# EAGLE board reflip_1.3 (EAGLE 8.7.0)
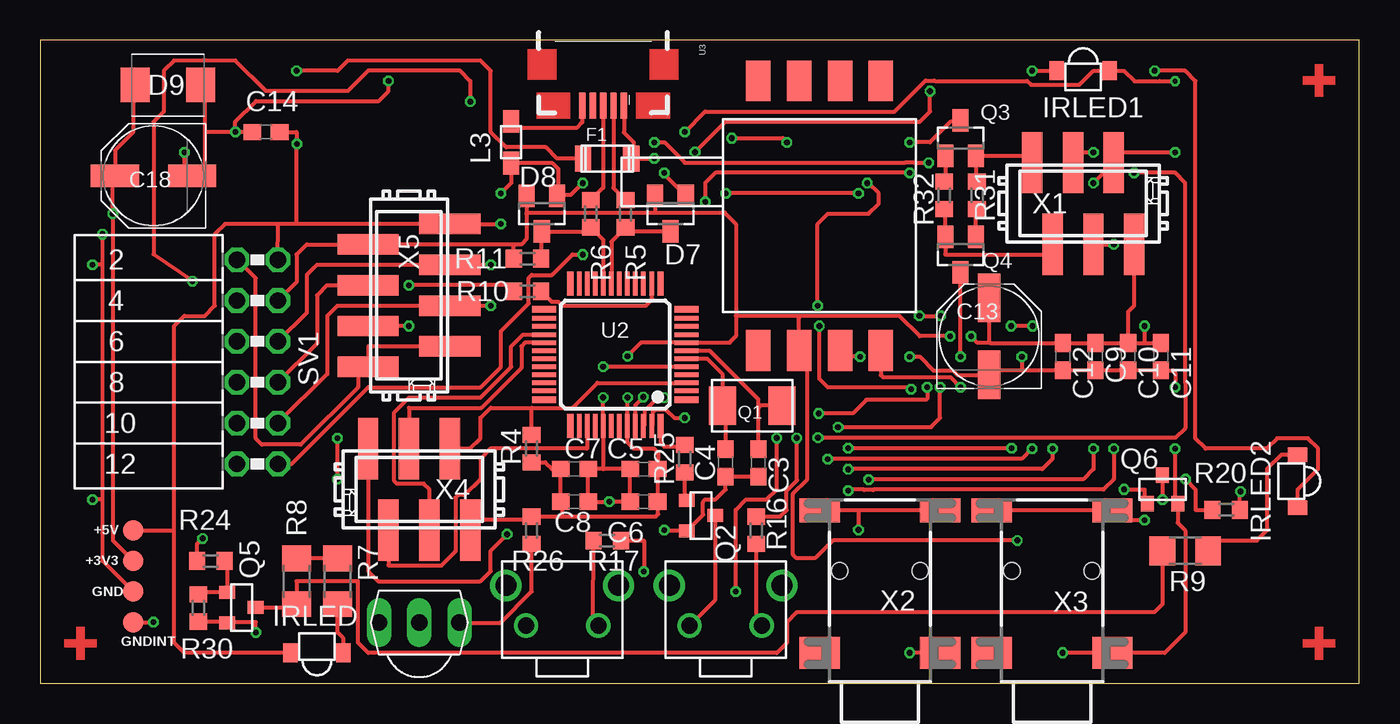
[diagram p0: board, top side]
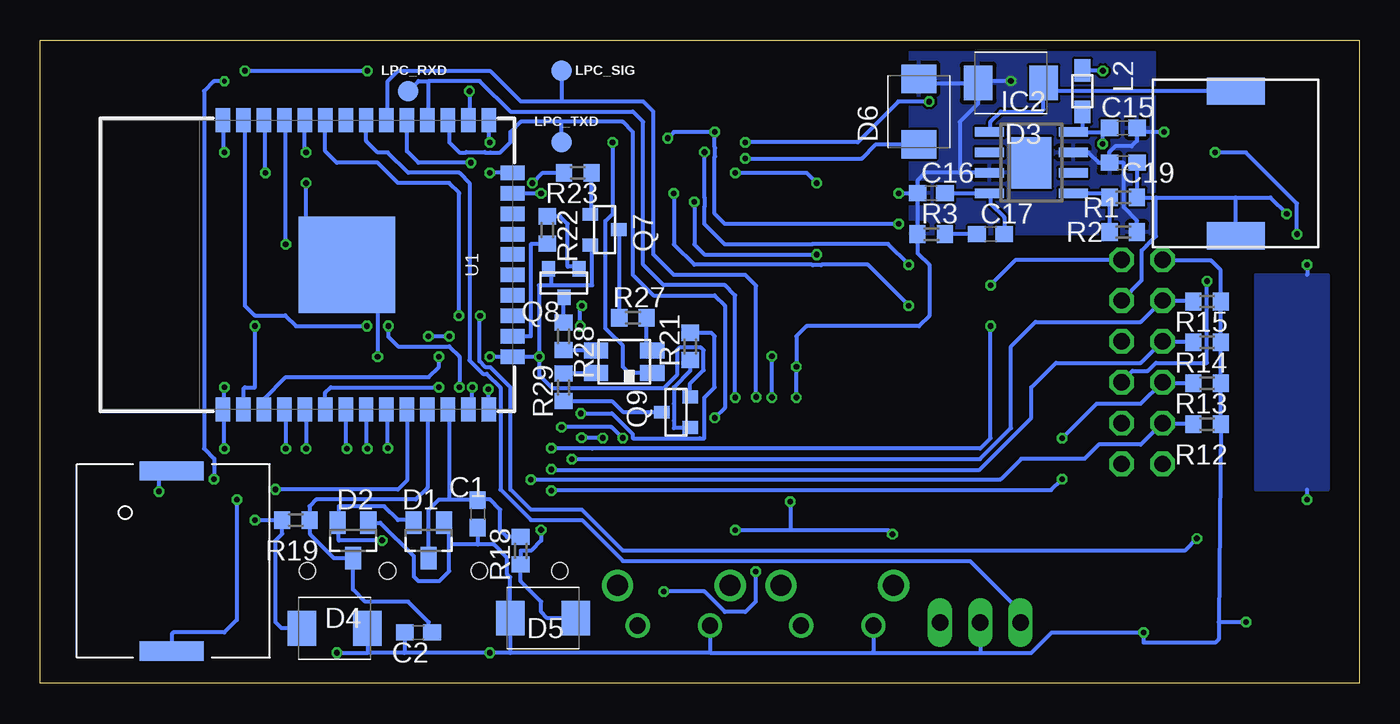
[diagram p1: board, bottom side, seen from below]

Size 82 x 40 mm. Coordinates in mm from the lower left corner, seen from the top.
Outline: 0,0 82,0 82,40 0,40 0,0
Copper layers (1*16): Top 0.035mm / dielectric 1.5mm / Bottom 0.035mm
Design rules "NOA Eagle Rule 2016-06-12": minimum track width 6mil, minimum drill 0.3mm, track to track 6mil, track to pad 6mil, pad to pad 6mil, via to via 6mil, smd to smd 0mil, copper to edge 0.4mm, drill to drill 10mil, minimum pad ring 10mil, minimum via ring 6mil, stop-mask expansion 2mil, vias tented up to drill 25mil, thermal gap 10mil

## Footprints (pad centres in the part's own frame; a part is rotated, then mirrored left to right if it is on the bottom)
C0603 = smd 1.1 x 1: 1 -0.85,0; 2 0.85,0
PANASONIC_D = smd 3 x 1.4: + 2.4,0; - -2.4,0
SOT23 = smd 1 x 1.4: 1 -0.95,-1.1; 2 0.95,-1.1; 3 0,1.1
SMBJ = smd 1.78 x 2.16: A 2.04,0; C -2.03,0
FUSE = smd 1 x 1.6: P$1 -1.5,0; P$2 1.5,0
HSOP8 = smd 0.6 x 1.8: 1 -1.905,-2.6; 2 -0.635,-2.6; 3 0.635,-2.6; 4 1.905,-2.6; 5 1.905,2.6; 6 0.635,2.6; 7 -0.635,2.6; 8 -1.905,2.6 | smd 3.2 x 2.51: EXP 0,0
IRLED = smd 0.9 x 1.2: A 1.65,0; C -1.65,0
SPULE = smd 3.6 x 1.7: P$1 0,4.5; P$2 0,-4.5
FERRITEBEAD = smd 1.4 x 1: P$1 -1.3,0; P$2 1.3,0
MPX_PRESSURE_SENSOR = smd 2.54 x 1.52: P$1 -8.38,3.81; P$2 -8.38,1.27; P$3 -8.38,-1.27; P$4 -8.38,-3.81; P$5 8.38,-3.81; P$6 8.38,-1.27; P$7 8.38,1.27; P$8 8.38,3.81
CRYSTAL = smd 1.7 x 2.4: P$1 -1.85,0; P$2 1.85,0
SOT-23 = smd 0.802 x 0.972: 1 0.95,0.885; 2 -0.95,0.885; 3 0,-0.885
R0603 = smd 1 x 1.1: 1 -0.85,0; 2 0.85,0
R1206 = smd 1.6 x 1.803: 1 -1.422,0; 2 1.422,0
RGBLED = smd 1.5 x 1: B -1.75,-0.7; CA 1.75,-0.7; G -1.75,0.7; R 1.75,0.7
FE06-2W = drill 1.016 octagon: 1 -6.35,1.27; 2 -6.35,-1.27; 3 -3.81,1.27; 4 -3.81,-1.27; 5 -1.27,1.27; 6 -1.27,-1.27; 7 1.27,1.27; 8 1.27,-1.27; 9 3.81,1.27; 10 3.81,-1.27; 11 6.35,1.27; 12 6.35,-1.27
SWITCHES = drill 1.3: P$1 -3.5,0; P$2 3.5,0 | drill 1: P$3 -2.25,-2.5; P$4 2.25,-2.5
ESP-WROOM-03 = smd 0.9 x 1.5: 1 7.7,9; 2 6.43,9; 3 5.16,9; 4 3.89,9; 5 2.62,9; 6 1.35,9; 7 0.08,9; 8 -1.19,9; 9 -2.46,9; 10 -3.73,9; 11 -5,9; 12 -6.27,9; 13 -7.54,9; 14 -8.81,9; 25 -8.81,-9; 26 -7.54,-9; 27 -6.27,-9; 28 -5,-9; 29 -3.73,-9; 30 -2.46,-9; 31 -1.19,-9; 32 0.08,-9; 33 1.35,-9; 34 2.62,-9; 35 3.89,-9; 36 5.16,-9; 37 6.43,-9; 38 7.7,-9 | smd 1.5 x 0.9: 15 -10.3,5.715; 16 -10.3,4.445; 17 -10.3,3.175; 18 -10.3,1.905; 19 -10.3,0.635; 20 -10.3,-0.635; 21 -10.3,-1.905; 22 -10.3,-3.175; 23 -10.3,-4.445; 24 -10.3,-5.715 | smd 6 x 6: GND 0,0
SOT313-2 = smd 0.4 x 1.5: 1 -2.81,-4.425; 12 2.81,-4.425; 25 2.81,4.425; 36 -2.81,4.425 | smd 0.28 x 1.5: 2 -2.25,-4.425; 3 -1.75,-4.425; 4 -1.25,-4.425; 5 -0.75,-4.425; 6 -0.25,-4.425; 7 0.25,-4.425; 8 0.75,-4.425; 9 1.25,-4.425; 10 1.75,-4.425; 11 2.25,-4.425; 26 2.25,4.425; 27 1.75,4.425; 28 1.25,4.425; 29 0.75,4.425; 30 0.25,4.425; 31 -0.25,4.425; 32 -0.75,4.425; 33 -1.25,4.425; 34 -1.75,4.425; 35 -2.25,4.425 | smd 1.5 x 0.4: 13 4.425,-2.81; 24 4.425,2.81; 37 -4.425,2.81; 48 -4.425,-2.81 | smd 1.5 x 0.28: 14 4.425,-2.25; 15 4.425,-1.75; 16 4.425,-1.25; 17 4.425,-0.75; 18 4.425,-0.25; 19 4.425,0.25; 20 4.425,0.75; 21 4.425,1.25; 22 4.425,1.75; 23 4.425,2.25; 38 -4.425,2.25; 39 -4.425,1.75; 40 -4.425,1.25; 41 -4.425,0.75; 42 -4.425,0.25; 43 -4.425,-0.25; 44 -4.425,-0.75; 45 -4.425,-1.25; 46 -4.425,-1.75; 47 -4.425,-2.25
USB-MICRO-SMD = smd 1.6 x 0.4: D+1 2.55,0; D-1 2.55,0.65; GND1 2.55,-1.3; ID1 2.55,-0.65; VBUS1 2.55,1.3
BUZZ_PIEZO_SMD = smd 1.2 x 4: 1 -5.6,0.1; 2 5.6,0.1
TSOP18XX = drill 1.016 pad 1.321 long: GND -0.001,-0.027; OUT -2.501,-0.027; VCC 2.499,-0.027
TESTPUNKT = smd 1.27 x 1.27: P$1 0,0
MICROMATCH-6SMD = smd 1.27 x 3.81: 1 3.175,-2.54; 2 1.905,2.54; 3 0.635,-2.54; 4 -0.635,2.54; 5 -1.905,-2.54; 6 -3.175,2.54
1503_02 = smd 2.5 x 1.5: 1 -3.75,-10.75; 3 3.75,-10.75 | smd 2.5 x 2: 2 -3.75,-1.9; 2@2 3.75,-1.9 | hole 1: -2.5,-7; 2.5,-7
MICROMATCH-8-SMD = smd 1.27 x 3.81: 1 4.445,-2.54; 2 3.175,2.54; 3 1.905,-2.54; 4 0.635,2.54; 5 -0.635,-2.54; 6 -1.905,2.54; 7 -3.175,-2.54; 8 -4.445,2.54

## Placement (x,y rotation side)
C1  22n  [C0603]  54.8,10.54 270 bottom
C2  22n  [C0603]  58.48,3.17 180 bottom
C3  18p  [C0603]  44.64,13.72 90 top
C4  18p  [C0603]  42.61,13.72 90 top
C5  100n  [C0603]  37.53,13.34 180 top
C6  10n  [C0603]  37.53,11.3 180 top
C7  100n  [C0603]  33.21,13.34 0 top
C8  10n  [C0603]  33.21,11.3 0 top
C9  1u  [C0603]  65.6,20.32 270 top
C10  10n  [C0603]  67.63,20.32 270 top
C11  100n  [C0603]  69.66,20.32 270 top
C12  10u  [C0603]  63.56,20.32 270 top
C13  100u  [PANASONIC_D]  58.99,21.59 90 top
C14  10n  [C0603]  14.04,34.29 0 top
C15  10u  [C0603]  14.67,34.54 180 bottom
C16  220p  [C0603]  26.61,30.48 0 bottom
C17  22n  [C0603]  22.93,27.94 0 bottom
C18  100u  [PANASONIC_D]  7.05,31.57 180 top
C19  10u  [C0603]  14.67,32.38 180 bottom
D1  BAT54S  [SOT23]  57.85,8.89 180 bottom
D2  BAT54S  [SOT23]  62.55,8.89 180 bottom
D3  RECT  [SMBJ]  21.66,37.34 180 bottom
D4  [SMBJ]  63.69,3.43 0 bottom
D5  [SMBJ]  50.74,4.06 180 bottom
D6  [SMBJ]  27.37,35.56 90 bottom
D7  BAT54S  [SOT23]  39.18,29.21 180 top
D8  BAT54S  [SOT23]  31.18,29.21 180 top
D9  [SMBJ]  7.94,37.21 0 top
F1  0.75A  [FUSE]  35.24,32.64 180 top
IC2  L5970D  [HSOP8]  20.39,32.38 270 bottom
IRLED  [IRLED]  17.21,1.91 180 top
IRLED1  [IRLED]  64.83,38.1 0 top
IRLED2  [IRLED]  78.17,12.57 270 top
L1  33u  [SPULE]  7.68,32.33 0 bottom
L2  FERRITE-BEAD  [FERRITEBEAD]  17.21,36.83 270 bottom
L3  FERRITE-BEAD  [FERRITEBEAD]  29.27,33.66 270 top
MPX  [MPX_PRESSURE_SENSOR]  48.45,29.08 90 top
Q1  CRYSTAL  [CRYSTAL]  44.26,17.27 180 top
Q2  POWERFET  [SOT-23]  41.09,10.44 90 top
Q3  BC847B  [SOT23]  57.22,33.91 0 top
Q4  BC847B  [SOT23]  57.22,26.67 180 top
Q5  POWERFET  [SOT-23]  12.51,4.72 90 top
Q6  POWERFET  [SOT-23]  69.76,12.06 180 top
Q7  POWERFET  [SOT-23]  46.93,28.22 90 bottom
Q8  POWERFET  [SOT-23]  49.44,24.89 0 bottom
Q9  POWERFET  [SOT-23]  42.48,16.87 270 bottom
R1  5k6  [R0603]  14.67,30.23 0 bottom
R2  3k3  [R0603]  14.67,28.07 180 bottom
R3  4k7  [R0603]  26.61,27.94 0 bottom
R4  10k  [R0603]  30.55,14.61 270 top
R5  33  [R0603]  36.39,29.21 270 top
R6  33  [R0603]  34.23,29.21 270 top
R7  22  [R1206]  18.48,6.35 90 top
R8  22  [R1206]  15.94,6.35 270 top
R9  22  [R1206]  71.19,8.26 180 top
R10  100  [R0603]  30.29,24.38 0 top
R11  1k5  [R0603]  30.29,26.42 180 top
R12  10k  [R0603]  9.46,16.13 180 bottom
R13  10k  [R0603]  9.46,18.67 180 bottom
R14  10k  [R0603]  9.46,21.21 180 bottom
R15  10k  [R0603]  9.46,23.75 180 bottom
R16  1k5  [R0603]  44.52,9.53 90 top
R17  1k5  [R0603]  35.24,8.89 0 top
R18  1k5  [R0603]  52.13,8.26 90 bottom
R19  1k5  [R0603]  66.11,10.16 0 bottom
R20  1k5  [R0603]  73.72,10.79 180 top
R21  100  [R0603]  41.59,20.95 90 bottom
R22  100  [R0603]  50.48,28.19 270 bottom
R23  100  [R0603]  48.58,31.75 180 bottom
R24  100  [R0603]  10.61,7.62 180 top
R25  100  [R0603]  40.07,13.97 90 top
R26  100  [R0603]  30.55,9.53 270 top
R27  150  [R0603]  45.15,22.73 0 bottom
R28  68  [R0603]  49.47,21.59 270 bottom
R29  68  [R0603]  49.47,18.41 90 bottom
R30  10k  [R0603]  9.84,4.7 270 top
R31  10k  [R0603]  58.23,30.35 270 top
R32  10k  [R0603]  56.2,30.35 90 top
RGB  RGBLED  [RGBLED]  45.7,20 0 bottom
SV1  CON-MAIN  [FE06-2W]  13.5,20 270 top
T1  SWITCH  [SWITCHES]  42.61,6.1 0 top
T2  SWITCH  [SWITCHES]  32.45,6.1 0 top
U1  ESP-WROOM-03  [ESP-WROOM-03]  62.93,26.04 180 bottom
U2  LPC11U14FBD  [SOT313-2]  35.75,20.45 90 top
U3  [USB-MICRO-SMD]  34.99,38.48 270 top
U$1  [BUZZ_PIEZO_SMD]  73.72,7.62 90 bottom
U$2  TSOP4838  [TSOP18XX]  23.56,3.81 0 top
U$3  PASSMARKE  [PASSMARKE]  2.5,2.5 0 top
U$4  PASSMARKE  [PASSMARKE]  79.5,2.5 0 top
U$5  PASSMARKE  [PASSMARKE]  79.5,37.5 0 top
U$6  TP1  [TESTPUNKT]  5.78,9.53 0 top
U$7  TP2  [TESTPUNKT]  5.78,7.62 0 top
U$8  TP3  [TESTPUNKT]  5.78,5.71 0 top
U$9  TP4  [TESTPUNKT]  5.78,3.81 0 top
U$10  TP7  [TESTPUNKT]  49.59,38.1 0 bottom
U$11  TP6  [TESTPUNKT]  59.12,36.83 0 bottom
U$12  TP5  [TESTPUNKT]  49.59,33.66 0 bottom
X1  ESP_PROG  [MICROMATCH-6SMD]  64.83,29.84 0 top
X2  1503_02  [1503_02]  52.2,0 180 top
X3  1503_02  [1503_02]  62.9,0 180 top
X4  LPC_JTAG  [MICROMATCH-6SMD]  23.56,12.06 180 top
X5  CON_EXT  [MICROMATCH-8-SMD]  22.93,24.13 270 top

## Library data of the parts
C1-C19 = rcl; SPICEPREFIX: C
D1 D2 D7 D8 = diode
D3-D6 D9 F1 IRLED IRLED1 IRLED2 L1-L3 MPX Q1 Q2 Q5-Q9 RGB SV1 T1 T2 U3 U$3-U$12 = 000_FlipMouse
IC2 = st-microelectronics; MF: STMICROELECTRONICS; MPN: L5973D; OC_FARNELL: 1077145
Q3 Q4 U2 = nxp_60
R1-R32 = rcl; SPICEPREFIX: R
U1 = esp32
U$1 = muRata-piezo
U$2 = tsop
X1 X4 X5 = 000_Con-amp-micromatch
X2 X3 = con-lumberg; OC_FARNELL: 1216979; OC_NEWARK: unknown

## Nets
+3V3: C5.1 C6.1 C7.1 C8.1 C9.1 C10.1 C11.1 C12.1 C13.+ C18.+ C19.1 D1.2 D2.2 D7.2 D8.2 D9.C L1.P$2 MPX.P$2 R1.2 R4.2 R11.2 R26.1 SV1.3 U1.2 U2.8 U2.44 U$7.P$1 X1.1 X4.6 X5.7
+5V: C14.2 C15.2 IC2.8 IRLED1.A IRLED.A L2.P$2 R10.1 R20.2 RGB.CA SV1.1 U$6.P$1 X5.8
BTN_1: C2.1 D2.3 R19.2 U1.11
BTN_2: C1.1 D1.3 R18.2 U1.12
BTN_INT_1: R16.2 U1.36
BTN_INT_2: R17.2 U1.37
BUZZER: Q6.1 U1.10
ESP_DTR: Q3.2 R31.1 X1.6
ESP_EN: Q4.3 U1.3
ESP_RTS: Q4.2 R32.1 X1.5
ESP_RXD0: U1.34 X1.4
ESP_TXD0: U1.35 X1.3
EXT_1: SV1.5 U1.26 X5.6
EXT_2: SV1.7 U1.29 X5.5
EXT_3: SV1.9 U1.23 X5.4
EXT_4: U1.9 X5.3
FSR_CH1: R15.2 SV1.4 U1.8
FSR_CH2: R14.2 SV1.6 U1.7
FSR_CH3: R13.2 SV1.8 U1.4
FSR_CH4: R12.2 SV1.10 U1.5
GND: C3.1 C4.1 C5.2 C6.2 C7.2 C8.2 C14.1 C15.1 C16.1 C18.- C19.2 D3.A D6.A D7.1 D8.1 D9.A IC2.3 IC2.7 L3.P$2 Q2.2 R2.1 R3.1 U2.5 U2.41 U$8.P$1 X4.1
GNDINT: C1.2 C2.2 C9.2 C10.2 C11.2 C12.2 C13.- D1.1 D2.1 D4.A D5.A MPX.P$3 Q2.3 Q5.2 Q6.2 Q7.2 Q8.2 Q9.2 R12.1 R13.1 R14.1 R15.1 R30.2 SV1.2 T1.P$3 T2.P$3 U1.1 U1.15 U1.38 U1.GND U$2.GND U$9.P$1 X1.2 X2.2 X3.2 X5.1 X5.2
GPIO0: Q3.3 U1.25
JTAG_RESET: R4.1 U2.3 X4.5
JTAG_TCLK_SWCLK: U2.29 X4.3
JTAG_TDO_SWO: U2.28 X4.4
JTAG_TMS_SWDIO: U2.39 X4.2
LED_B: R23.2 U1.14
LED_G: R22.2 U1.16
LED_IR: R24.2 U1.33
LED_R: R21.2 U1.13
LPC_RXD: U1.28 U2.46 U$11.P$1
LPC_SIG: U1.30 U2.45 U$10.P$1
LPC_TXD: U1.27 U2.47 U$12.P$1
N$1: IC2.5 R1.1 R2.2
N$2: Q9.1 R21.1
N$3: D3.C IC2.1 L1.P$1
N$4: R6.1 U3.D+1
N$8: Q2.1 R25.1
N$9: R5.1 U3.D-1
N$10: C17.1 R3.2
N$11: C4.2 Q1.P$2 U2.6
N$12: IRLED1.C IRLED2.A
N$13: C16.2 C17.2 IC2.4
N$14: Q8.1 R22.1
N$15: Q7.1 R23.1
N$16: Q7.3 R27.1
N$17: IRLED2.C R9.1
N$18: R7.2 R8.1
N$19: R27.2 RGB.R
N$20: R10.2 U2.14
N$21: D6.C F1.P$1 U3.VBUS1
N$22: F1.P$2 L2.P$1
N$23: C3.2 Q1.P$1 U2.7
N$24: R17.1 T2.P$4
N$25: R20.1 U$1.2
N$26: D5.C R18.1 X2.1 X2.3
N$27: Q5.3 R8.2 R9.2
N$28: D4.C R19.1 X3.1 X3.3
N$29: Q6.3 U$1.1
N$30: R28.2 RGB.G
N$31: R26.2 U$2.VCC
N$32: L3.P$1 U3.GND1
N$34: R29.2 RGB.B
N$35: Q9.3 R29.1
N$36: Q8.3 R28.1
N$43: Q5.1 R24.1 R30.1
N$45: IRLED.C R7.1
N$46: Q4.1 R31.2
N$47: Q3.1 R32.2
NEOPIXEL: SV1.11 U1.24
POWERFET: R25.2 U2.48
PRESSURE: MPX.P$4 U1.6
T1: R16.1 T1.P$4
TSOP: U1.31 U$2.OUT
USB_DM: D7.3 R5.2 U2.19
USB_DP: D8.3 R6.2 R11.1 U2.20

## Tracks (layer width: path | path; a pad name or v marks a point on that pad's centre or on a via)
+3V3  (via drill 0.35)
  Top 0.254: 38.08,30.31 D7.2 38.23,29.35 38.16,29.28 | 30.54,30.31 D8.2 | 30.4,30.14 D8.2 | D8.2 30.23,29.21 | 30.23,29.21 30.23,27.62 29.91,27.3 29.53,27.3 | 29.53,27.3 X5.7 16.57,27.3 15.94,26.67 15.94,24.95 SV1.3 | R11.2 29.44,27.22 29.53,27.3 | 30.23,29.21 30.3,29.28 38.16,29.28 | X4.6 26.73,10.16 30.33,10.16 R26.1 32.45,10.38 | 59.03,21.17 C12.1 C9.1 C10.1 | C10.1 68.64,21.17 | 68.64,21.17 C11.1 | C10.1 67.63,23.11 68.01,23.5 X1.1 | v68.64,22.23 68.64,21.17 | 59.03,21.17 58.99,21.21 C13.+ | 59.03,21.17 58.27,21.17 57.85,21.59 v57.87,21.59 | v56.56,21.59 54.67,21.59 53.41,22.86 47.05,22.86 | 38.16,29.28 42.54,29.28 43.24,28.57 43.24,22.86 | 43.24,22.86 43.24,21.59 42.85,21.2 U2.8 37.36,21.2 v36.51,20.36 | 32.45,10.38 32.45,11.21 C8.1 C7.1 31.82,13.34 31.39,13.76 R4.2 | 32.45,10.38 38.25,10.38 38.42,10.54 38.42,11.26 C6.1 C5.1 38.42,13.37 38.42,14.35 38.16,14.61 36.9,14.61 36.48,15.03 36.48,15.99 U2.44 36.5,17.77 v36.51,17.78 | 47.05,22.86 43.24,22.86 | 47.05,22.86 47.18,22.73 MPX.P$2 47.18,20.95 47.69,20.45 47.69,12.7 46.8,11.81 46.8,8 47.02,7.78 48.16,7.78 49.27,8.89 v60.74,8.89 | D9.C 5.78,36.83 5.78,34.29 4.65,33.16 C18.+ 4.51,30.98 v4.51,29.21 4.51,8.89 U$7.P$1
  Bottom 0.254: C19.1 R1.2 12.64,30.23 | 12.64,30.23 7.68,30.23 | L1.P$2 7.68,30.23 | 69.28,17.11 U1.2 69.36,18.34 69.28,18.41 68.64,18.41 v68.64,22.23 | v57.87,21.59 v56.56,21.59 | v36.51,17.78 v36.51,20.36 | D1.2 58.97,10.16 59.76,10.16 60.62,11.02 63.44,11.02 63.44,10.05 D2.2 63.44,9.93 63.44,8.89 v60.74,8.89 | 7.68,30.23 5.53,30.23 v4.51,29.21 | SV1.3 13.53,25.08 13.53,26.92 13.21,27.24 13.2,27.24 13.04,27.4 13.04,27.41 12.64,27.81 12.64,30.23
+5V  (via drill 0.3 pad 0.61, 0.35)
  Top 0.254: 15.94,28.57 X5.8 v28.64,28.57 | R10.1 29.06,24.77 v22.93,24.77 | 15.94,28.57 15.94,33.57 | 15.94,33.57 v15.96,33.55 | C14.2 15.94,34.29 15.94,33.57 | IRLED.A 8.96,1.91 8.32,2.54 8.32,9.53 | 8.32,9.53 8.32,22.23 8.96,22.86 10.22,22.86 10.86,23.5 10.86,27.94 11.49,28.57 14.8,28.57 | v40.07,34.29 41.34,35.56 53.11,35.56 55.04,37.49 55.58,37.49 55.6,37.47 61.37,37.47 61.61,37.22 64.59,37.22 65.47,38.1 IRLED1.A 67.38,38.1 68.03,37.44 69.55,37.44 69.58,37.47 70.55,37.47 v70.55,37.44 | v71.21,12.7 71.21,12.68 71.82,12.06 71.82,10.79 R20.2 | v42.99,33.91 46.17,33.91 v46.42,33.66 | U$6.P$1 8.32,9.53 | 15.94,28.57 14.8,28.57 | SV1.1 14.8,28.57
  Bottom 0.254: IC2.8 17.21,34.29 | 17.21,34.29 15.94,34.29 | 15.94,34.29 15.77,34.29 C15.2 | L2.P$2 17.21,34.29 | v15.96,33.55 15.94,33.57 15.94,34.29 | v28.64,28.57 39.44,28.57 40.07,29.21 40.07,32.75 40.05,32.77 40.05,33.31 40.07,33.34 v40.07,34.29 42.61,34.29 v42.99,33.91 | v70.55,37.44 71.21,37.44 71.82,36.83 71.82,14.61 71.19,13.97 71.19,12.7 v71.21,12.7 | v46.42,33.66 46.42,29.2 46.86,28.76 46.86,22.07 46.83,22.05 46.64,21.85 45.78,21 45.78,19.68 45.4,19.3 RGB.CA | SV1.1 21.34,26.35 v22.93,24.77
BTN_1
  Bottom 0.254: U1.11 57.93,12.16 58.66,11.43 64.83,11.43 65.25,11.01 R19.2 65.22,10.12 65.22,9.27 63.73,7.79 D2.3 62.55,5.84 61.79,5.08 59.12,5.08 57.85,3.81 57.85,3.39 C2.1
BTN_2
  Bottom 0.254: U1.12 56.58,16.32 56.58,11.43 | 54.84,11.43 C1.1 | R18.2 52.98,9.11 53.41,9.53 53.41,10.79 54.04,11.43 54.84,11.43 | D1.3 57.85,10.79 57.22,11.43 56.58,11.43 | 56.58,11.43 54.84,11.43
BTN_INT_1  (via drill 0.35)
  Top 0.254: R16.2 46,10.38 46.4,10.77 46.4,11.98 47.05,12.64 47.05,15.24 v47.03,15.26 | v48.35,15.29 70.59,15.29 71.21,15.9 71.21,18.69 71.19,18.71 71.19,31.11 70.55,31.75 v68.01,31.75
  Bottom 0.254: v47.03,15.26 48.3,15.26 48.33,15.24 48.35,15.26 v48.35,15.29 | v68.01,31.75 68.01,34.95 U1.36
BTN_INT_2  (via drill 0.35)
  Top 0.254: R17.2 37.53,8.89 v37.53,6.96 | v43.24,5.71 43.24,10.79 43.88,11.43 45.15,11.43 45.78,12.06 v45.78,15.26 | v61.68,22.23 v60.37,22.23 | v55.95,18.41 55.95,16.51 55.38,15.94 v49.59,15.94
  Bottom 0.254: v37.53,6.96 37.53,5.08 38.16,4.45 39.44,4.45 40.7,5.71 v43.24,5.71 | U1.37 69.28,34.95 69.28,23.5 68.67,22.88 66.76,22.88 66.11,22.23 v61.68,22.23 | v60.37,22.23 60.37,21.57 59.76,20.95 56.58,20.95 55.95,20.32 v55.95,18.41 | v45.78,15.26 45.81,15.26 46.49,15.94 v49.59,15.94
BUZZER  (via drill 0.35)
  Top 0.254: v67.38,12.06 68.64,12.06 68.64,11.35 Q6.1
  Bottom 0.254: U1.10 59.2,12.62 59.76,12.06 v67.38,12.06
ESP_DTR
  Top 0.254: R31.1 58.16,31.27 Q3.2 61.24,32.81 X1.6
ESP_EN  (via drill 0.35)
  Top 0.254: v57.22,20.32 Q4.3
  Bottom 0.254: U1.3 68.09,17.7 66.74,19.05 57.85,19.05 57.22,19.68 v57.22,20.32
ESP_RTS
  Top 0.254: R32.1 56.27,29.44 Q4.2 56.27,26.67 62.93,26.67 X1.5
ESP_RXD0  (via drill 0.35)
  Top 0.254: v65.47,33.02 64.2,33.02 X1.4
  Bottom 0.254: v65.47,33.02 65.55,33.1 U1.34
ESP_TXD0  (via drill 0.35)
  Top 0.254: X1.3 v66.74,27.3
  Bottom 0.254: v66.74,27.3 66.74,34.95 U1.35
EXT_1  (via drill 0.35)
  Top 0.254: v28,26.04 X5.6 17.21,26.04 16.57,25.4 16.57,23.05 SV1.5 | v40.7,33.04 42.59,34.92 54.67,34.92 55.31,35.56 v55.31,36.83
  Bottom 0.254: v28,26.04 29.3,27.33 33.99,27.33 34.02,27.3 39.44,27.3 40.7,28.57 40.7,29.64 40.68,29.67 40.68,30.21 40.7,30.23 v40.7,33.04 | v55.31,36.83 55.31,35.12 U1.26
EXT_2  (via drill 0.35)
  Top 0.254: X5.5 17.84,24.77 17.21,24.13 17.21,21.14 SV1.7 | v38.16,33.66 38.8,33.66 40.07,32.38 53.74,32.38 53.77,32.41 54.31,32.41 54.34,32.38 v55.23,32.38 55.31,32.38 | v9.46,25.02 7.05,26.67 7.05,34.92 7.68,35.56 7.68,38.1 8.32,38.73 12.13,38.73 14.04,36.83 19.11,36.83 20.41,38.12 26.08,38.12 26.73,37.47 v26.73,36.18
  Bottom 0.254: v26.73,36.18 28.66,36.18 31.18,33.66 v38.16,33.66 | v55.23,32.38 58.48,32.38 59.2,33.1 U1.29 | SV1.7 14.1,19.43 13.15,19.43 12.64,19.94 9.46,19.94 v9.46,25.02
EXT_3  (via drill 0.35)
  Top 0.254: v28,23.5 X5.4 18.48,23.5 17.84,22.86 17.84,19.24 SV1.9 | v50.87,30.48 v42.61,30.48
  Bottom 0.254: v28,23.5 30.55,26.04 33.42,26.04 33.45,26.01 33.99,26.01 34.02,26.04 41.34,26.04 42.61,27.3 v42.61,30.48 | U1.23 v50.87,30.48
EXT_4  (via drill 0.35)
  Top 0.254: v60.39,14.63 60.37,14.61 50.21,14.61 v50.23,14.63 | v22.93,22.23 X5.3
  Bottom 0.254: U1.9 60.39,16.32 v60.39,14.63 | v22.93,22.23 22.93,15.24 23.56,14.61 47.69,14.61 47.71,14.63 v50.23,14.63
FSR_CH1  (via drill 0.35)
  Top 0.254: v61.66,14.61 61.02,13.97 48.96,13.97 v48.96,13.95
  Bottom 0.254: U1.8 61.74,14.69 v61.66,14.61 | v48.96,13.95 23.58,13.95 21.66,15.88 21.66,20.95 20.13,22.48 13.59,22.48 SV1.4 10.37,23.81 R15.2
FSR_CH2  (via drill 0.35, 0.35 pad 0.55)
  Top 0.254: v62.93,14.61 62.93,13.97 62.3,13.34 50.23,13.34 v50.23,13.31
  Bottom 0.254: U1.7 63.01,14.69 v62.93,14.61 | v50.23,13.31 50.21,13.29 23.61,13.29 20.39,16.51 20.39,18.41 18.86,19.94 13.59,19.94 SV1.6 10.37,21.27 R14.2
FSR_CH3  (via drill 0.35)
  Top 0.254: v66.74,14.61 66.74,12.7 66.11,12.06 51.82,12.06 51.77,12.02 51.23,12.02 51.18,12.06 50.3,12.06 v50.23,12 | v18.48,12.7 v18.48,15.24
  Bottom 0.254: U1.4 66.74,16.32 v66.74,14.61 | v18.48,12.7 19.16,12.02 50.23,12.02 v50.23,12 | v18.48,15.24 16.32,17.4 13.59,17.4 SV1.8 12.2,18.67 R13.2
FSR_CH4  (via drill 0.35)
  Top 0.254: v65.47,14.61 65.47,13.34 64.83,12.7 51.5,12.7 v51.5,12.68
  Bottom 0.254: U1.5 65.47,16.32 v65.47,14.61 | v51.5,12.68 51.48,12.7 22.29,12.7 21.02,13.97 17.08,13.97 16.19,14.86 13.59,14.86 SV1.10 12.2,16.13 R12.2
GND  (via drill 0.35)
  Top 0.254: 32.13,30.8 D8.1 32.2,30.38 | v12.13,34.29 12.13,34.92 13.42,36.22 21.04,36.22 21.66,36.83 v21.66,37.47 | 32.2,30.38 32.2,32 31.82,32.38 29.3,32.38 L3.P$2 29.27,31.11 v28.64,30.48 | C4.1 C3.1 | Q2.2 41.21,10.49 41.21,11.3 41.34,11.43 41.98,11.43 42.61,12.06 C4.1 | 42.57,12.83 C4.1 | 34.99,13.34 C5.2 C6.2 v35.37,11.3 C8.2 C7.2 34.99,13.34 | C14.1 v12.13,34.29 | Q2.2 40.16,9.53 | 34.99,13.34 34.99,14.61 U2.41 35,17.77 v34.99,17.78 | Q2.2 38.84,9.49 v38.8,9.53 | v34.99,19.68 35,19.7 U2.5 | D7.1 38.8,31.64 v38.8,31.75 | 32.2,30.38 32.98,30.38 v33.72,31.11 | X4.1 20.39,6.99 21.02,6.35 27.37,6.35 28,6.99 28,8.26 v29.02,9.27 | D9.A 10.22,36.71 10.22,34.29 | 10.22,34.29 10.22,31.11 C18.- 8.96,31.11 v8.96,33.02 | v12.13,34.29 10.22,34.29 | U$8.P$1 3.88,7.62 3.88,11.43 | 3.88,11.43 3.88,26.04 | 3.88,26.04 v3.88,27.94 | 3.88,26.04 v3.24,26.04 | 3.88,11.43 v3.24,11.43
  Bottom 0.254: IC2.7 16.83,33.02 16.19,32.38 15.69,32.38 | 15.69,32.38 C19.2 14.67,32.38 14.65,32.36 14.65,29.61 13.82,28.78 R2.1 | 15.69,32.38 15.56,32.51 15.56,33.02 15.18,33.4 14.16,33.4 13.82,33.74 C15.1 13.57,34.29 v12.13,34.29 | IC2.3 24.83,31.75 | 24.83,31.75 26.99,31.75 27.46,31.28 C16.1 | C16.1 R3.1 27.46,26.76 26.73,26.04 26.73,22.86 27.37,22.23 34.35,22.23 34.99,21.59 v34.99,19.68 v34.99,17.78 | v21.66,37.47 23.57,37.47 D3.A | D6.A 27.11,37.34 D3.A | D3.A 23.7,36.06 24.83,34.92 24.83,31.75 | v28.64,30.48 C16.1 | v38.8,31.75 34.35,31.75 v33.72,31.11 | v29.02,9.27 29.27,9.53 35.37,9.53 | 35.37,9.53 v38.8,9.53 | v35.37,11.3 35.37,9.53 | v3.88,27.94 3.88,29.84 7.05,33.02 v8.96,33.02 | v3.24,26.04 3.24,25.4 | v3.24,11.43 3.24,12.06
  pour Bottom: 1.97,25.4 1.97,12.06 6.42,12.06 6.42,25.4
  pour Bottom: 15.24,27.94 27.94,27.94 27.94,39.24 12.7,39.24 12.7,27.94
GNDINT  (via drill 0.35)
  Top 0.254: X2.2 v54.04,1.91 | X5.2 20.39,20.95 X5.1 19.75,19.68 19.75,18.41 16.19,14.86 13.78,14.86 13.4,15.24 13.4,25.21 SV1.2 | R30.2 11.55,3.85 11.59,3.81 | 11.59,3.81 Q5.2 | v13.4,3.17 13.4,3.81 11.59,3.81 | v70.55,33.02 66.74,33.02 X1.2 v65.47,31.11 | T1.P$3 41.97,5.21 Q2.3 | 61.02,19.47 C12.2 C9.2 C10.2 C11.2 70.38,19.47 70.55,19.3 v70.55,18.41 | 61.02,19.47 59.27,19.47 C13.- 57.02,19.19 56.75,19.46 55.54,19.46 54.67,20.32 v54.04,20.32 | 49.59,20.83 MPX.P$3 50.1,20.32 v50.97,20.32 | v70.55,14.61 70.55,11.34 Q6.2 70.71,10 71.19,9.53 71.19,3.17 69.91,1.9 X3.2 66.67,1.91 v63.56,1.91 | v61.02,20.32 61.02,19.47 | U$9.P$1 v7.05,3.81
  Bottom 0.254: 40.32,1.91 30.29,1.91 | 30.29,1.91 23.56,1.91 | 23.56,1.91 20.39,1.91 19.11,3.17 v13.4,3.17 13.4,2.54 8.96,2.54 8.74,2.75 8.74,3.81 | U$2.GND 23.56,1.91 | T2.P$3 30.2,2 30.29,1.91 | 8.74,3.81 R12.1 R13.1 R14.1 R15.1 8.61,25.69 9.21,26.29 12.2,26.29 SV1.2 | U1.38 70.63,33.1 v70.55,33.02 | v70.55,18.41 70.55,17.11 U1.1 70.55,16.95 v70.55,14.61 | v54.04,20.32 U1.15 v50.97,20.32 | T1.P$3 40.36,1.94 40.32,1.91 | v65.47,31.11 65.47,28.57 U1.GND 61.02,24.13 v61.02,20.32 | 40.32,1.91 52.77,1.91 | 52.77,1.91 v54.04,1.91 59.37,1.91 | 59.37,1.91 61.66,1.91 | D4.A 61.66,1.91 | 52.77,1.91 52.78,1.91 D5.A 52.78,6.6 52.96,6.79 52.96,7.81 53.79,8.64 54.8,8.64 | C2.2 59.34,1.94 59.37,1.91 | D2.1 60.85,9.99 58.79,7.92 58.79,6.65 58.48,6.35 57.22,6.35 56.58,6.99 56.58,8.64 | C1.2 54.8,8.64 | D1.1 56.58,9.67 56.58,8.64 | 56.58,8.64 56.57,8.64 54.8,8.64 | v63.56,1.91 61.66,1.91 | Q7.2 47.69,27.15 47.69,24.77 48.92,24.77 48.93,24.77 49.96,24.77 49.97,24.77 50.23,24.77 | Q8.2 50.23,25.61 50.23,24.77 | v50.97,20.32 50.97,24.74 50.99,24.77 50.23,24.77 | Q9.2 41.6,18.66 40.77,19.49 40.77,20.72 40.93,20.88 42.26,20.88 42.42,20.72 42.42,19.18 43.26,18.34 50.16,18.34 50.97,19.16 v50.97,20.32 | v7.05,3.81 8.74,3.81
GPIO0  (via drill 0.35)
  Top 0.254: v54.04,33.66 55.31,33.66 56.58,34.92 57.13,34.92 Q3.3
  Bottom 0.254: U1.25 54.12,33.73 v54.04,33.66
JTAG_RESET
  Top 0.254: U2.3 34.64,18.7 33.09,17.14 30.55,17.14 | 30.55,17.14 28,17.14 27.37,16.51 27.37,15.24 26.73,14.61 X4.5 | R4.1 30.55,17.14
JTAG_TCLK_SWCLK
  Top 0.254: X4.3 22.93,17.14 27.43,17.14 29.91,19.62 29.91,20.95 30.15,21.2 U2.29
JTAG_TDO_SWO
  Top 0.254: X4.4 24.2,12.06 23.84,12.42 22.17,12.42 22.01,12.58 22.01,16.87 22.93,17.78 27.37,17.78 29.27,19.68 29.27,20.95 30.02,21.7 U2.28
JTAG_TMS_SWDIO
  Top 0.254: U2.39 34,14.63 33.97,14.61 28,14.61 27.37,13.97 27.37,12.7 26.38,11.71 25.98,11.71 25.82,11.55 25.82,8.21 24.95,7.34 21.68,7.34 21.66,7.37 X4.2
LED_B  (via drill 0.35)
  Top 0.254: v54.15,18.3 54.04,18.41 48.96,18.41 48.44,18.94 v48.44,22.23 | v48.33,23.5 48.33,28.57 48.96,29.21 51.5,29.21 52.13,29.84 52.13,30.48 51.5,31.11 v51.4,31.11
  Bottom 0.254: U1.14 54.12,18.27 v54.15,18.3 | v48.44,22.23 48.44,23.38 v48.33,23.5 | v51.4,31.11 50.77,31.75 R23.2
LED_G
  Bottom 0.254: U1.16 51.5,21.59 51.5,27.3 51.46,27.34 R22.2
LED_IR  (via drill 0.35)
  Top 0.254: R24.2 9.76,8.68 v10.1,9.02 | v54.65,22.86 v55.97,22.86
  Bottom 0.254: v10.1,9.02 10.86,8.26 45.78,8.26 48.33,10.79 51.5,10.79 52.77,12.06 52.77,18.41 54.02,19.66 54.31,19.66 54.7,20.05 54.7,22.82 v54.65,22.86 | v55.97,22.86 55.97,30.46 55.95,30.48 56.58,31.11 59.76,31.11 61.02,32.38 63.56,32.38 64.28,33.1 U1.33
LED_R  (via drill 0.35)
  Top 0.254: v55.14,18.41 55.14,17.71 55.06,17.63 51.35,17.63 50.51,16.79 v48.4,16.79
  Bottom 0.254: U1.13 55.14,17.29 v55.14,18.41 | v48.4,16.79 46.45,16.79 45.18,15.51 45.18,15.27 45.15,15.23 41,15.23 40.99,15.24 40.7,15.24 40.7,17.78 40.07,18.41 40.07,21.59 40.28,21.8 R21.2
LPC_RXD  (via drill 0.35)
  Top 0.254: U2.46 37.58,16.1 37.58,16.96 38.4,17.78 v38.8,17.78
  Bottom 0.254: v38.8,17.78 38.8,24.13 39.44,24.77 43.24,24.77 44.52,26.04 44.52,34.92 45.15,35.56 52.77,35.56 54.67,37.47 57.85,37.47 | U1.28 57.85,35.12 57.85,37.47 | U$11.P$1 58.48,37.47 57.85,37.47
LPC_SIG  (via drill 0.35)
  Top 0.254: U2.45 37,17.31 v37.5,17.81
  Bottom 0.254: v37.5,17.81 37.5,24.73 38.16,25.4 42.61,25.4 43.88,26.67 43.88,35.56 44.52,36.2 49.59,36.2 | U1.30 60.39,35.12 60.39,37.47 59.76,38.1 54.04,38.1 52.13,36.2 49.59,36.2 | U$10.P$1 49.59,36.2
LPC_TXD  (via drill 0.35)
  Top 0.254: U2.47 38.08,16.1 38.08,16.89 38.25,17.05 38.88,17.05 39.42,16.51 v40.07,16.51
  Bottom 0.254: U1.27 56.58,34.95 56.58,33.66 55.95,33.02 55.53,33.02 55.51,33.04 54.36,33.04 54.31,33 54.04,33 | 54.04,33 53.77,33 | 49.59,34.92 45.78,34.92 45.15,34.29 45.15,25.4 43.88,24.13 40.07,24.13 39.44,23.5 39.44,17.14 v40.07,16.51 | 49.59,34.92 52.13,34.92 52.77,34.29 52.77,33.66 53.41,33.02 54.02,33.02 54.04,33 | U$12.P$1 49.59,34.92
N$1
  Bottom 0.254: IC2.5 15.77,30.48 R1.1 R2.2
N$2
  Bottom 0.254: R21.1 41.59,19.43 42.61,18.41 42.61,17.39 42.6,17.38 42.6,16.35 42.61,16.34 42.61,15.88 42.57,15.92 Q9.1
N$3
  Bottom 0.254: 22.29,34.29 IC2.1 22.93,34.35 22.93,34.92 22.29,35.56 19.75,35.56 19.62,35.69 D3.C 19.12,36.83 L1.P$1
N$4
  Top 0.254: U3.D+1 34.99,30.82 R6.1
N$8
  Top 0.254: Q2.1 40.07,11.52 R25.1
N$9
  Top 0.254: U3.D-1 35.64,30.81 R5.1
N$10
  Bottom 0.254: C17.1 R3.2
N$11
  Top 0.254: U2.6 41.46,20.2 42.41,19.25 Q1.P$2 42.61,17.07 C4.2
N$12  (via drill 0.35)
  Top 0.254: v69.28,38.1 71.19,38.1 71.82,37.47 71.82,15.24 72.45,14.61 76.27,14.61 76.9,15.24 78.81,15.24 79.44,14.61 79.44,13.34 78.17,12.06 IRLED2.A | v61.66,38.1 IRLED1.C
  Bottom 0.254: v69.28,38.1 v61.66,38.1
N$13
  Bottom 0.254: C16.2 IC2.4 22.93,30.42 22.93,29.84 22.07,29 C17.2
N$14
  Bottom 0.254: Q8.1 48.62,25.91 49.21,25.91 49.21,28.57 49.68,29.04 R22.1
N$15
  Bottom 0.254: Q7.1 47.73,29.25 R23.1
N$16
  Bottom 0.254: R27.1 46,28.18 Q7.3
N$17
  Top 0.254: R9.1 73.24,8.89 75.63,8.89 76.27,9.53 76.27,13.34 77.15,14.22 IRLED2.C
N$18
  Top 0.254: R7.2 R8.1
N$19
  Bottom 0.254: RGB.R 44.3,20.8 R27.2
N$20
  Top 0.254: R10.2 31.79,23.74 32.19,23.74 32.43,23.5 37.66,23.5 38.04,23.88 38.04,24.84 U2.14
N$21  (via drill 0.35)
  Top 0.254: U3.VBUS1 36.29,34.26 36.9,33.66 36.9,32.79 F1.P$1 v38.16,32.64
  Bottom 0.254: v38.16,32.64 30.93,32.64 30.04,33.53 D6.C
N$22  (via drill 0.35)
  Top 0.254: F1.P$2 32.14,32.64 31.44,33.33 28.96,33.33 28,34.29 28,38.1 27.37,38.73 19.11,38.73 18.48,38.1 v15.94,38.1
  Bottom 0.254: v15.94,38.1 17.18,38.1 L2.P$1
N$23
  Top 0.254: U2.7 41.6,20.7 44.64,17.65 44.64,17.14 | 45.78,16.95 Q1.P$1 44.77,17.27 44.64,17.14 | C3.2 44.64,17.14
N$24
  Top 0.254: T2.P$4 34.35,3.94 R17.1
N$25  (via drill 0.35)
  Top 0.254: R20.1 74.58,11.9 v74.61,11.94
  Bottom 0.254: v74.61,11.94 74.61,12.95 74.88,13.22 | 75,13.34 74.88,13.22 | 74.88,13.22 U$1.2
N$26  (via drill 0.35)
  Top 0.203: 56.16,10.96 X2.1
  Top 0.254: X2.1 50.87,10.75 | 50.87,10.75 X2.3 48.33,10.62 | 50.87,10.75 v50.87,9.55 50.87,9.53
  Bottom 0.254: D5.C 50.48,4.06 50.87,4.45 50.87,5.08 52.13,6.35 R18.1 52.13,8.26 51.5,8.26 50.87,8.89 v50.87,9.55
N$27
  Top 0.254: Q5.3 15.74,4.72 R8.2 15.94,6.35 19.75,6.35 19.75,2.54 20.39,1.91 45.78,1.91 46.42,2.54 46.42,3.81 47.05,4.45 69.28,4.45 69.76,4.93 R9.2
N$28  (via drill 0.35)
  Top 0.254: 59.54,11.11 X3.3 X3.1 67.27,10.16 v68.64,10.16
  Bottom 0.254: D4.C 66.99,3.43 67.38,3.81 67.38,8.89 66.95,9.31 R19.1 v68.64,10.16
N$29  (via drill 0.35)
  Top 0.254: Q6.3 69.76,11.45 v69.78,11.43
  Bottom 0.254: v69.78,11.43 69.78,3.94 70.55,3.17 73.72,3.17 73.83,3.08 U$1.1
N$30
  Bottom 0.254: RGB.G 49.43,20.7 R28.2
N$31
  Top 0.254: U$2.VCC 28.61,3.78 30.55,5.71 R26.2
N$32
  Top 0.254: U3.GND1 33.69,34.9 33.34,34.54 29.69,34.54 L3.P$1
N$34
  Bottom 0.254: RGB.B 47.23,19.27 R29.2
N$35
  Bottom 0.254: R29.1 46.46,17.57 45.78,16.89 43.39,16.89 Q9.3
N$36
  Bottom 0.254: R28.1 49.47,23.98 Q8.3
N$43
  Top 0.254: R24.1 11.63,7.45 Q5.1 9.97,5.67 R30.1
N$45
  Top 0.254: IRLED.C 18.86,2.79 18.48,3.17 R7.1
N$46
  Top 0.254: Q4.1 58.16,29.44 R31.2
N$47
  Top 0.254: Q3.1 56.27,31.27 R32.2
NEOPIXEL  (via drill 0.35)
  Top 0.254: v33.72,26.67 33.09,26.67 31.82,25.4 30.55,25.4 30.36,25.22 30.36,23.64 28.64,21.91 28.64,19.68 27.37,18.41 20.39,18.41 15.62,13.65 SV1.11 | v54.04,31.75 41.98,31.75 41.34,31.11 v41.34,29.94 41.34,29.84
  Bottom 0.254: U1.24 v54.04,31.75 | v41.34,29.94 41.34,27.3 40.7,26.67 v33.72,26.67
POWERFET
  Top 0.254: 38.63,16.09 U2.48 38.56,14.97 38.8,14.73 39.98,14.73 R25.2
PRESSURE  (via drill 0.35)
  Top 0.254: 52.13,20.83 MPX.P$4 52.26,19.18 52.39,19.05 56.58,19.05 v57.22,18.41
  Bottom 0.254: U1.6 64.28,18.08 63.95,18.41 v57.22,18.41
T1
  Top 0.254: T1.P$4 44.52,3.94 R16.1
TSOP
  Bottom 0.254: U$2.OUT 21.06,4.48 24.2,7.62 45.78,7.62 48.33,10.16 51.5,10.16 53.39,12.05 53.39,18.4 54.25,19.26 54.48,19.26 55.31,20.09 55.31,31.11 55.95,31.75 59.12,31.75 60.39,33.02 61.02,33.02 61.74,33.73 U1.31
USB_DM
  Top 0.254: U2.19 35.5,27.48 R5.2 36.64,28.11 D7.3
USB_DP
  Top 0.254: U2.20 34.99,26.15 34.99,27.6 R6.2 33.98,28.11 D8.3 31.14,28.07 R11.1

## Text on the board
tNames: +5V | +3V3 | GND | GNDINT
bNames: LPC_SIG | LPC_RXD | LPC_TXD
bStop: Kapsch >>> / LP-REFLIP 1.0-DK / 40602850001